# Altium PCB MainBoard_PCB.PcbDoc
Units mil, origin at the board's own origin, x right, y up, seen from the top; angles counter-clockwise.
Board outline 4850 x 3150 mil, 2 copper layers (Top Layer, Bottom Layer); 20 components, 32 nets, 91 pads, 0 vias.
Unrouted connection lines stored in the file: 2.
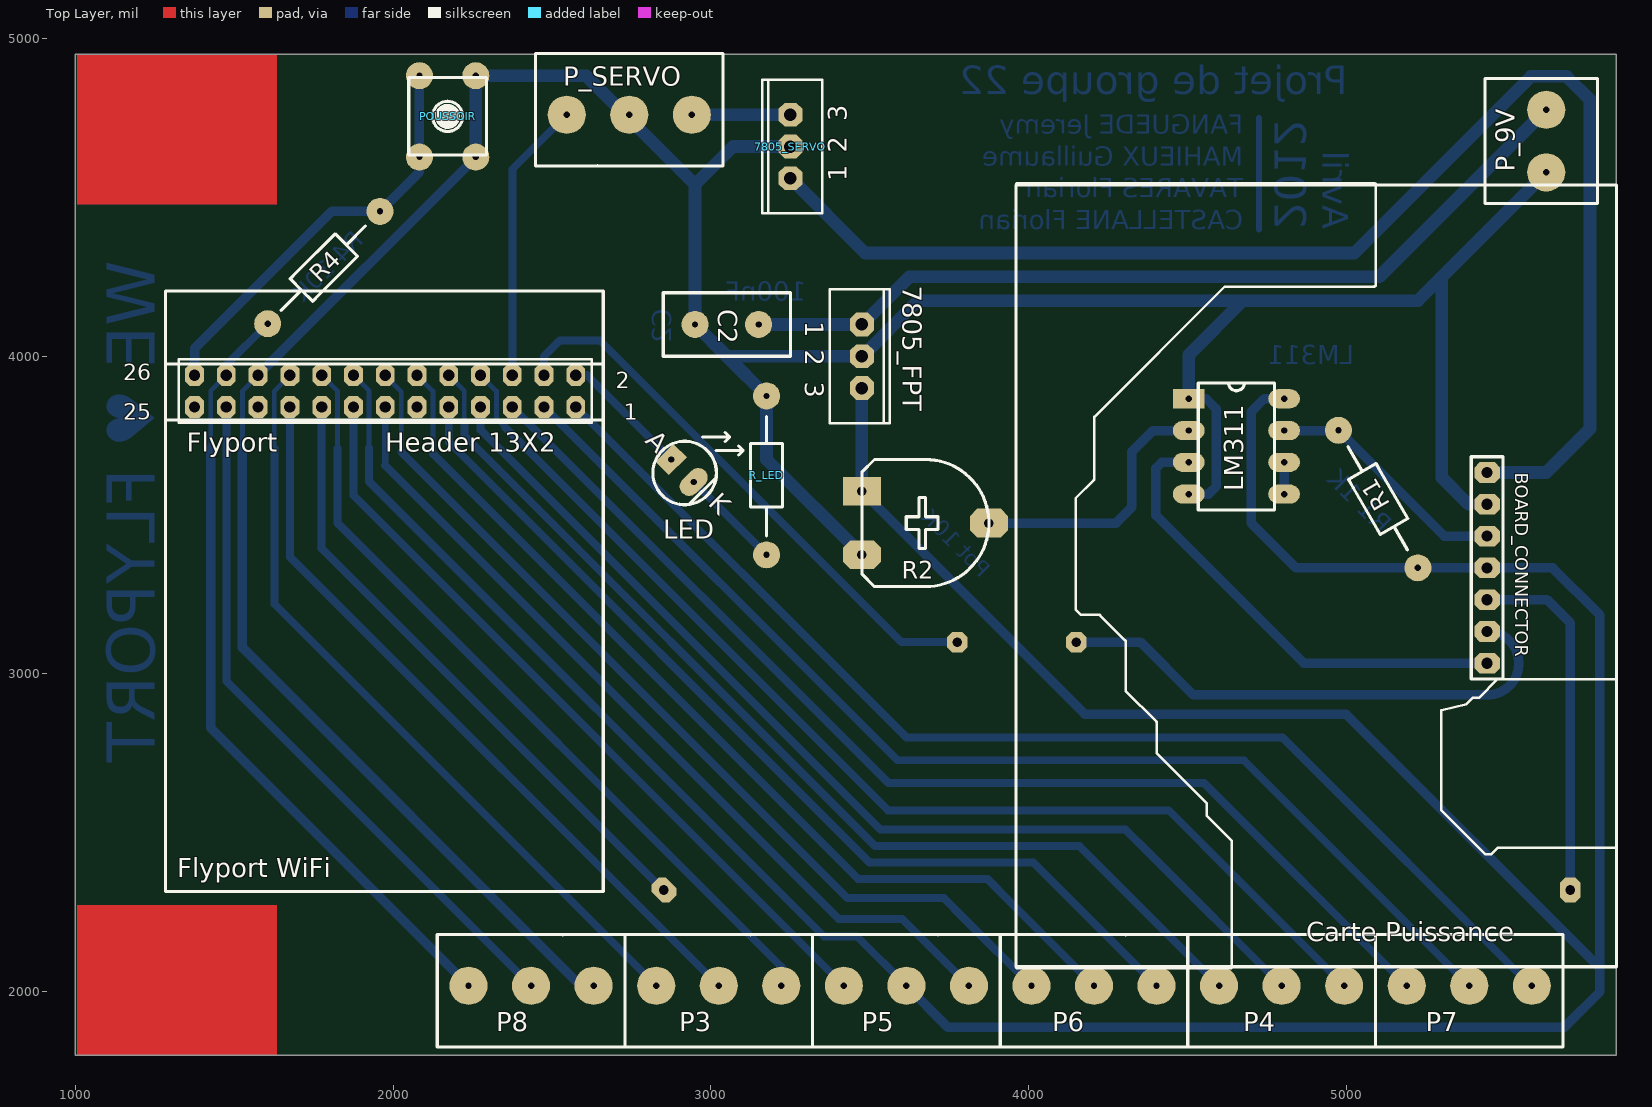
[diagram p0: Top Layer view]
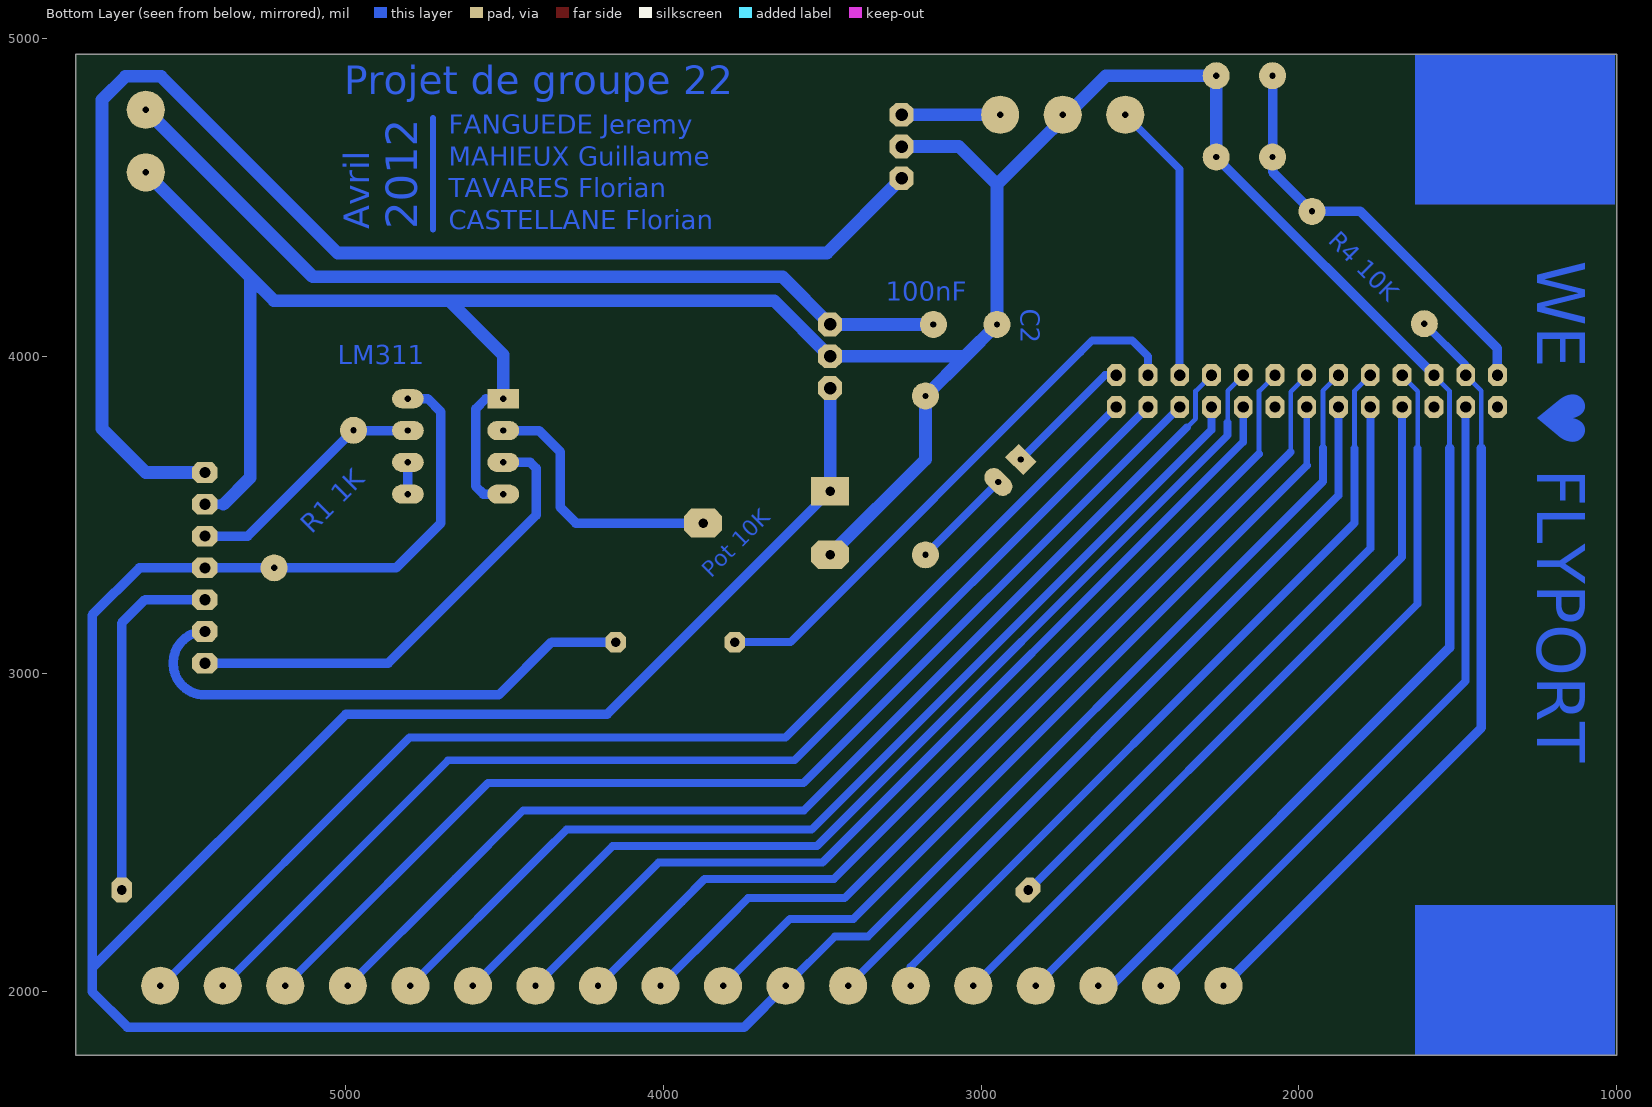
[diagram p1: Bottom Layer view, seen from below]

## Layer stack, top to bottom
Top Layer: signal copper 1.4
Dielectric: dielectric 12.6, FR-4, Dk 4.8
Bottom Layer: signal copper 1.4

## Board outline
1000,4950 5850,4950 5850,1800 1000,1800

## Design rules (kind name [scope] priority, off if disabled: settings)
Clearance [All] p1: gap=12
PlaneConnect [All] p1: planeconnectstyle=Relief reliefexpansion=20 reliefentries=4 reliefconductorwidth=20 reliefairgap=10
PolygonConnect [All] p1: connectstyle=Relief reliefconductorwidth=20 reliefentries=4 polygonreliefangle="45 Angle"
RoutingVias [All] p1: holewidth=20 width=60 viastyle="Through Hole" minholewidth=20 minwidth=60 maxholewidth=20 maxwidth=60
SilkscreenOverComponentPads [All] p1: minsilkscreentomaskgap=10
SolderMaskExpansion [All] p1: expansion=4
Width [All] p1: maxlimit=40 minlimit=15 preferedwidth=20
26 further rules are at their usual default settings.

## Components (designator, comment, footprint, x,y, rotation, side; value= is the part's Value field where it differs from the comment)
7805_FPT "Régulateur de tension 5V (Flyport)" TO-220-AB 3475,4000 r270 top
7805_SERVO "Régulateur de tension 5V (Servomoteur)" TO-220-AB 3250,4660 r90 top
BOARD_CONNECTOR "Connexion carte de puissance" HDR1X7 5442.91,3633.86 r270 top
C2 "Cap2" CAPA2 3150,4100 r180 top
Flyport "Header 13X2" HDR2X13 2574.8,3840.55 r180 top
LED "Led" LED 2875,3675 r315 top
LM311 "Comparateur de tension" DIP8 4503.94,3866.14 r0 top
P3 "Bornier_3" Bornier_3 2729.33,2018.7 r0 top
P4 "Bornier_3" Bornier_3 4500.98,2018.7 r0 top
P5 "Bornier_3" Bornier_3 3319.88,2018.7 r0 top
P6 "Bornier_3" Bornier_3 3910.43,2018.7 r0 top
P7 "Bornier_3" Bornier_3 5091.53,2018.7 r0 top
P8 "Bornier_3" Bornier_3 2138.78,2018.7 r0 top
P_9V "Bornier Pile 9V" Bornier_2 5628.94,4874.01 r270 top
P_SERVO "Bornier Servomoteur" Bornier_3 3038.39,4760 r180 top
POUSSOIR "SW-PB" SW_BP 2171.26,4754.92 r270 top
R1 "Res2" res5_1/4W 4975,3767 r300 top
R2 "RPot" AJUSTABLE 3475,3575 r270 top
R4 "Res2" res5_1/4W 1604.92,4102.36 r45 top
R_LED "" res5_1/4W 3175,3375 r90 top

## Footprints (in the part's own frame and the unit in brackets; to place one, negate y for a bottom-side part, rotate by r counter-clockwise, add the part's x,y. Pads: shape width x height; smd on the part's side, far side on the other; paste and mask are expansions set on the pad)
AJUSTABLE [mil]
  rect 90x120 hole 30: 1(0,0)
  oct 90x120 hole 30: 2(100,400) 3(200,0)
  silkscreen extent -100,0 300,400
Bornier_2 [mil]
  round 120 hole 20: 1(98.43,0) 2(295.28,0)
  silkscreen extent 0,-193 394,161
Bornier_3 [mil]
  round 120 hole 20: 1(98.43,0) 2(295.28,0) 3(492.13,0)
  silkscreen extent 0,-193 591,161
CAPA2 [mil]
  round 85 hole 20: 1(0,0) 2(200,0)
  silkscreen extent -100,-100 300,100
DIP8 [mil]
  rect 100x60 hole 20: 1(0,0)
  oval 100x60 hole 20: 2(0,-100) 3(0,-200) 4(0,-300) 5(300,-300) 6(300,-200) 7(300,-100) 8(300,0)
  silkscreen extent 30,-350 270,50
HDR1X7 [mil] "Connector; Header; 7 Position"
  oct 65x80 hole 35.43: 1(0,0) 2(100,0) 3(200,0) 4(300,0) 5(400,0) 6(500,0) 7(600,0)
  silkscreen extent -50,-50 650,50
HDR2X13 [mm] "Connector; Header; 13x2 Position"
  oct 1.5x1.778 hole 0.9: 1(0,0) 2(0,-2.54) 3(2.54,0) 4(2.54,-2.54) 5(5.08,0) 6(5.08,-2.54) 7(7.62,0) 8(7.62,-2.54) 9(10.16,0) 10(10.16,-2.54) 11(12.7,0) 12(12.7,-2.54) 13(15.24,0) 14(15.24,-2.54) 15(17.78,0) 16(17.78,-2.54) 17(20.32,0) 18(20.32,-2.54) 19(22.86,0) 20(22.86,-2.54) 21(25.4,0) 22(25.4,-2.54) 23(27.94,0) 24(27.94,-2.54) 25(30.48,0) 26(30.48,-2.54)
  silkscreen extent -1.27,-3.81 31.75,1.27
LED [mil]
  rect 60x80 hole 20: 1(0,0)
  oval 60x100 hole 20: 2(100,0)
  silkscreen extent -40,-100 160,180
res5_1/4W [mil]
  round 85 hole 20: 1(0,0) 2(500,0)
  silkscreen extent 60,-50 435,50
SW_BP [mil]
  round 85 hole 20: 1(-127.95,88.58) 2(127.95,88.58) 3(-127.95,-88.58) 4(127.95,-88.58)
  silkscreen extent -122,-122 122,122
TO-220-AB [mm] "TO, Thru-Hole, Vertical, Heatsink Mounted; 3 In-Line Leads; Pitch 2.54 mm"
  oct 1.905x1.905 hole 1: 1(-2.54,0) 2(0,0) 3(2.54,0)
  silkscreen extent -5.35,-2.55 5.35,2.25

## Part data
7805_FPT 7805_SERVO: library part SCR, "Silicon Controlled Rectifier"
BOARD_CONNECTOR: library part "Header 7", "Header, 7-Pin"
C2: "Capacitor"
Flyport: "Header, 13-Pin, Dual row"
LED: "LED"
LM311: library part LM311N, "Voltage Comparator"
P3 P4 P5 P6 P7 P8: "Header, 3-Pin"
P_9V: library part Bornier_2, "Header, 2-Pin"
P_SERVO: library part Bornier_3, "Header, 3-Pin"
POUSSOIR: "Switch"
R1 R4: "Resistor"
R2: "Potentiometer"
R_LED: library part Res2, "Resistor"

## Free pads (board coordinates)
  oct 65x65 hole 30: 2(3775,3100) 3(4150,3100)
  oct 65x80 hole 30: 4(5705,2320)
  oct 80x65 hole 30 rot 135: 5(2852,2320)

## Nets (pads, with @x,y where several pads share a name; then routed paths per layer and width w, separated by ;. In a path a pad name is that pad's centre, name@x,y a point inside that pad or via, vN(x,y) a via of type N, cw(c..) or ccw(c..) an arc to the next point about the centre after c; other vN are vias at no path point)
3V3FLYPORT: Flyport.24 P8.1 R4.1 | length 2494
  Bottom Layer w15: 1425.78,3710.63 1425.78,3891.52 Flyport.24
  Bottom Layer w25: Flyport.24 1474.8,3972.24 R4.1
  Bottom Layer w30: 1425.78,3710.63 1425.78,2830.13 P8.1
AN1_23: Flyport.23 P8.2 | length 2219.2
  Bottom Layer w25: Flyport.23 1474.8,2977.95 P8.2
AN4_18: Flyport.18 P3.3 | length 2521.1
  Bottom Layer w15: Flyport.18 1824.8,3890.55 1824.8,3710.28
  Bottom Layer w25: 1824.8,3710.28 1824.8,3475.2 3221.46,2078.54 P3.3
AN5_20: Flyport.20 P3.1 | length 2481.4
  Bottom Layer w15: 1625.78,3710.28 1625.78,3889.58 1674.8,3938.61 Flyport.20 ; P3.1 P3.1@2827.76,2060.04
  Bottom Layer w25: 1625.78,3710.28 1625.78,3220.68 P3.1
BOARD_LED: Flyport.21
CURRENT_SENSE: BOARD_CONNECTOR.7 LM311.3 | length 1494.9
  Bottom Layer w30: LM311.3 4419.09,3666.14 4400,3647.05 4400,3500 4866.14,3033.86 BOARD_CONNECTOR.7
EN: BOARD_CONNECTOR.3 LM311.7 R1.1 | length 777.3
  Bottom Layer w20: BOARD_CONNECTOR.3@5442.77,3434 BOARD_CONNECTOR.3
  Bottom Layer w25: R1.1@4974.14,3766.14 R1.1
  Bottom Layer w30: LM311.7 R1.1@4974.14,3766.14 ; R1.1 5308,3434 BOARD_CONNECTOR.3@5442.77,3434
GND: 7805_FPT.2 7805_SERVO.2 BOARD_CONNECTOR.2 C2.2 Flyport.22 LM311.1 LM311.4 P8.3 P_9V.2 P_SERVO.2 POUSSOIR.1 POUSSOIR.2 R2.3 R_LED.2 | length 10608.3
  Bottom Layer w15: 1525.78,3710.28 1525.78,3891.52 Flyport.22
  Bottom Layer w20: POUSSOIR.2 POUSSOIR.2@2260.53,4626.28 ; P8.3@2589.57,2018.7 P8.3
  Bottom Layer w30: 1525.59,3710.28 1525.59,3082.68 P8.3@2589.57,2018.7 ; Flyport.22 POUSSOIR.2@2260.53,4626.28 ; LM311.4 4566.14,3566.14 4590.55,3590.55 4590.55,3834.45 4558.86,3866.14 ; 5384.7,3533.86 BOARD_CONNECTOR.2
  Bottom Layer w40: POUSSOIR.2 POUSSOIR.1 2607.28,4882.87 2950,4540.16 ; 7805_SERVO.2 3069.84,4660 2950,4540.16 ; R2.3 3175,3675 R_LED.2 3050,4000 ; LM311.1 4503.94,4003.94 4675,4175 ; 5384.7,3533.86 5300,3618.56 5300,4249.8 ; P_9V.2 5300,4249.8 ; 2950,4540.16 C2.2 3050,4000 ; 3050,4000 7805_FPT.2 3476.5,4000 3651.5,4175 4675,4175 ; 4675,4175 5225.2,4175 5300,4249.8
I2C_CLK: Flyport.1 P7.3 | length 3775.9
  Bottom Layer w25: Flyport.1 3615.16,2800.2 4799.21,2800.2 P7.3@5591.54,2007.87
I2C_DATA: Flyport.3 P7.2 | length 3666.6
  Bottom Layer w25: Flyport.3 3587.01,2728.35 4677.16,2728.35 P7.2
IN1: Flyport.5 P7.1 | length 3569.8
  Bottom Layer w25: Flyport.5 3558.86,2656.5 4552.16,2656.5 P7.1
IN2: Flyport.7 P4.2 | length 3318.3
  Bottom Layer w25: Flyport.7 2274.8,3768.5 3533.46,2509.84 4305.12,2509.84 4376.97,2437.99 P4.2
IN3: Flyport.9 P6.3 | length 3046.7
  Bottom Layer w25: Flyport.9 2174.8,3730.71 3499.02,2406.5 4014.76,2406.5 P6.3
LED_OUTPUT: Flyport.2 LED.1 | length 410.2
  Bottom Layer w25: Flyport.2 2609.45,3940.55 LED.1
NetLED_2: LED.2 R_LED.1 | length 324.3
  Bottom Layer w25: LED.2 R_LED.1
NetLM311_2: LM311.2 R2.2 | length 852
  Bottom Layer w30: R2.2 4275,3475 4325,3525 4325,3700 4391.14,3766.14 LM311.2
NetLM311_5: LM311.5 LM311.6 | length 100
  Bottom Layer w30: LM311.5 LM311.6
OUT3_PWM: Flyport.19 P3.2 | length 2381
  Bottom Layer w25: Flyport.19 1674.8,3368.5 P3.2
PWM1: BOARD_CONNECTOR.6 Flyport.4 pad.2 pad.3 | length 3449.6
  Bottom Layer w25: Flyport.4 2474.8,3999.8 2525,4050 2650,4050 2687.5,4012.5 3600,3100 pad.2
  Bottom Layer w30: pad.3 4351.77,3100 4517.91,2933.86 5442.91,2933.86 ccw(c5442.91,3033.86) BOARD_CONNECTOR.6
PWM2: BOARD_CONNECTOR.5 Flyport.17 pad.4 pad.5 | length 3100
  Bottom Layer w25: Flyport.17 1774.8,3395.2 pad.5@2851,2319
  Bottom Layer w30: BOARD_CONNECTOR.5 5541.14,3233.86 5631.14,3233.86 5705,3160 pad.4
PWM_SERVO: Flyport.6 P_SERVO.3 | length 890.5
  Bottom Layer w25: Flyport.6 2374.8,4588.54 P_SERVO.3
RST_B: Flyport.26 POUSSOIR.3 POUSSOIR.4 R4.2 | length 1324.9
  Bottom Layer w30: Flyport.26 1374.8,4024.8 1805.92,4455.92 R4.2 2082.68,4580.12 POUSSOIR.4 POUSSOIR.3
RX: Flyport.13 P5.3 | length 2715.2
  Bottom Layer w15: P5.3@3796.66,2018.7 P5.3
  Bottom Layer w20: 1974.8,3656.1 Flyport.13
  Bottom Layer w25: 1974.8,3656.1 3401.57,2229.33 3601.38,2229.33 P5.3
SPI_CLK_8: Flyport.8 P4.3 | length 3565.6
  Bottom Layer w15: Flyport.8 2325,3890.36 2325,3802.95 2351.48,3776.48
  Bottom Layer w25: 2351.48,3776.48 3557.09,2570.87 4440.95,2570.87 4654.53,2357.28 P4.3
SPI_CS_14: Flyport.14 P6.1 | length 2942
  Bottom Layer w15: Flyport.14 1974.8,3938.61 2025.59,3887.82 2025.59,3698.82
  Bottom Layer w25: 2025.59,3698.82 3430.12,2294.29 3733.27,2294.29 3795.28,2232.28 P6.1
SPI_IN_12: Flyport.12 P6.2 | length 3042.6
  Bottom Layer w15: Flyport.12 2125,3890.36 2125,3692.91
  Bottom Layer w25: 2125,3692.91 3463.58,2354.33 3870.08,2354.33 3941.93,2282.48 P6.2
SPI_OUT_10: Flyport.10 P4.1 | length 3302.7
  Bottom Layer w15: Flyport.10 2223.83,3891.52 2223.83,3790.93
  Bottom Layer w25: 2223.83,3790.93 2223.83,3751.56 3516.73,2458.66 4159.45,2458.66 4280.02,2338.09 P4.1
TX: Flyport.15 P5.1 | length 2461.2
  Bottom Layer w25: Flyport.15 1874.8,3562.2 P5.1
V_5V_FPT: 7805_FPT.3 BOARD_CONNECTOR.4 Flyport.16 LM311.8 P5.2 R1.2 R2.1 | length 11130.4
  Bottom Layer w15: Flyport.16 1924.21,3891.14 1924.21,3710.63
  Bottom Layer w25: 1924.21,3710.63 1924.21,3605.54 3356.52,2173.23 3460.63,2173.23 P5.2
  Bottom Layer w30: R2.1 4176.97,2873.03 4999.02,2873.03 5798.02,2074.02 ; P5.2 3745.08,1888.78 5687.01,1888.78 5798,1999.77 5798,2324 5798,3184.99 5649.13,3333.86 BOARD_CONNECTOR.4 5442.85,3333.92 4841.08,3333.92 4700,3475 4700,3825 4741.14,3866.14 LM311.8
  Bottom Layer w40: R2.1 7805_FPT.3
V_5V_SERVO: 7805_SERVO.3 P_SERVO.1 | length 310
  Bottom Layer w40: P_SERVO.1 7805_SERVO.3
V_9V: 7805_FPT.1 C2.1 P_9V.1 | length 2758.8
  Bottom Layer w40: C2.1 7805_FPT.1 3625,4250 5103.35,4250 P_9V.1
V_BAT: 7805_SERVO.1 BOARD_CONNECTOR.1 | length 4291.2
  Bottom Layer w40: 7805_SERVO.1 3485,4325 5025,4325 5580.91,4880.91 5692.91,4880.91 5766.73,4807.09 5766.73,3771.65 5628.94,3633.86 BOARD_CONNECTOR.1
pads on no net: Flyport.11 Flyport.25
copper on no net: | length 350
  Bottom Layer w20: 4725,4400 4725,4750

## Polygon pours and split planes (outlines as drawn)
no net on Top Overlay "Bottom Layer-No Net" (none): 5299.09,2570.47 5299.09,2885.43 5377.83,2905.12 5397.52,2924.8 5417.2,2924.8 5476.26,2983.86 5850.28,2983.86 5850.28,2452.36 5476.26,2452.36 5456.57,2432.68 5436.89,2432.68
no net on Top Overlay "Bottom Layer-No Net" (none): 3960.51,2078.74 ccw(c3965.53,2078.74) 3965.53,2073.73 4634.82,2073.73 ccw(c4634.82,2078.74) 4639.83,2078.74 4639.83,2472.44 ccw(c4634.82,2472.44) 4638.35,2476 4638.36,2475.99 4561.09,2553.26 4561.09,2590.55 ccw(c4556.08,2590.55) 4559.61,2594.11 4559.62,2594.1 4403.61,2750.11 4403.61,2846.46 ccw(c4398.6,2846.46) 4402.13,2850.02 4402.14,2850 4305.19,2946.96 4305.19,3102.36 ccw(c4300.17,3102.36) 4303.7,3105.93 4303.72,3105.91 4224.98,3184.65 4225,3184.63 ccw(c4221.43,3181.1) 4221.43,3186.12 4164.45,3186.12 4147.71,3202.86 4147.71,3553.04 4205.29,3610.63 4205.28,3610.61 ccw(c4201.75,3614.17) 4206.76,3614.17 4206.76,3808.95 4617.21,4219.39 5087.57,4219.39 ccw(c5087.57,4224.41) 5092.59,4224.41 5092.59,4539.37 ccw(c5087.57,4539.37) 5087.57,4544.39 3965.53,4544.39 ccw(c3965.53,4539.37) 3960.51,4539.37

## Other copper
Bottom Layer:
  text "Projet de groupe 22" at 5005,4825 h90
  text "FANGUEDE Jeremy" at 4675,4700 h60
  text "MAHIEUX Guillaume" at 4675,4600 h60
  text "TAVARES Florian" at 4675,4500 h60
  text "CASTELLANE Florian" at 4675,4400 h60
  text "2012" at 4775,4400 h100 r270
  text "Avril" at 4925,4400 h80 r270
  text "R4 10K" at 1910,4360 h55 r45
  text "WE ♥ FLYPORT" at 1300,4300 h260 r90
  text "100nF" at 3300,4175 h60
  text "C2" at 2875,4150 h60 r90
  text "LM311" at 5025,3975 h60
  text "R1 1K" at 5106.7,3438.89 h60 r315
  text "Pot 10K" at 3850,3300 h50 r315
Multi-Layer:
  rectangle: 1004.92,4477.56 1634.84,4949.81
  rectangle: 1004.92,1800.4 1634.84,2272.64

## Silkscreen, mask and mechanical layers (free items; w line width, h text height)
Top Overlay:
  lines w10: 1283,3798.98 2660.95,3798.98 ; 1283,3975.98 2660.95,3975.98 ; 5492.91,3028.46 5492.91,3683.86 ; 5492.91,3683.86 5492.91,2983.86 5392.91,2983.86 5392.91,3683.86 5492.91,3683.86 ; 1283,2315.24 2660.95,2315.24 2660.95,4205 1283,4205 1283,2315.24 ; 3960.51,2078.74 5850.28,2078.74 5850.28,4539.37 3960.51,4539.37 3960.51,2078.74
  text "Flyport WiFi" at 1319.88,2360.24 h60
  text "Carte Puissance" at 4873.31,2158.86 h60

## Dimensions
5850,1800 to 5850,4950 on Top Layer
5850,1800 to 1000,1800 on Top Layer

## Text inside footprints (layer, text, board x,y; h text height)
7805_FPT: Top Overlay "1" at 3296.85,4109.84 h59.06 r270; Top Overlay "2" at 3296.85,4019.68 h59.06 r270; Top Overlay "3" at 3296.85,3919.68 h59.06 r270
7805_SERVO: Top Overlay "1" at 3428.15,4550.16 h59.06 r90; Top Overlay "2" at 3428.15,4640.31 h59.06 r90; Top Overlay "3" at 3428.15,4740.31 h59.06 r90
Flyport: Top Overlay "26" at 1150,3925 h50; Top Overlay "25" at 1150,3800 h50; Top Overlay "1" at 2725,3800 h50; Top Overlay "2" at 2700,3900 h50
LED: Top Overlay "A" at 2790.15,3731.57 h60 r315; Top Overlay "K" at 2988.14,3533.58 h60 r315